# Altium PCB PCB1.PcbDoc (part 2 of 2)
Units mil, origin at the board's own origin, x right, y up, seen from the top; angles counter-clockwise.
Board outline 3870 x 3210 mil, 2 copper layers (Top Layer, Bottom Layer); 94 components, 94 nets, 473 pads, 156 vias.
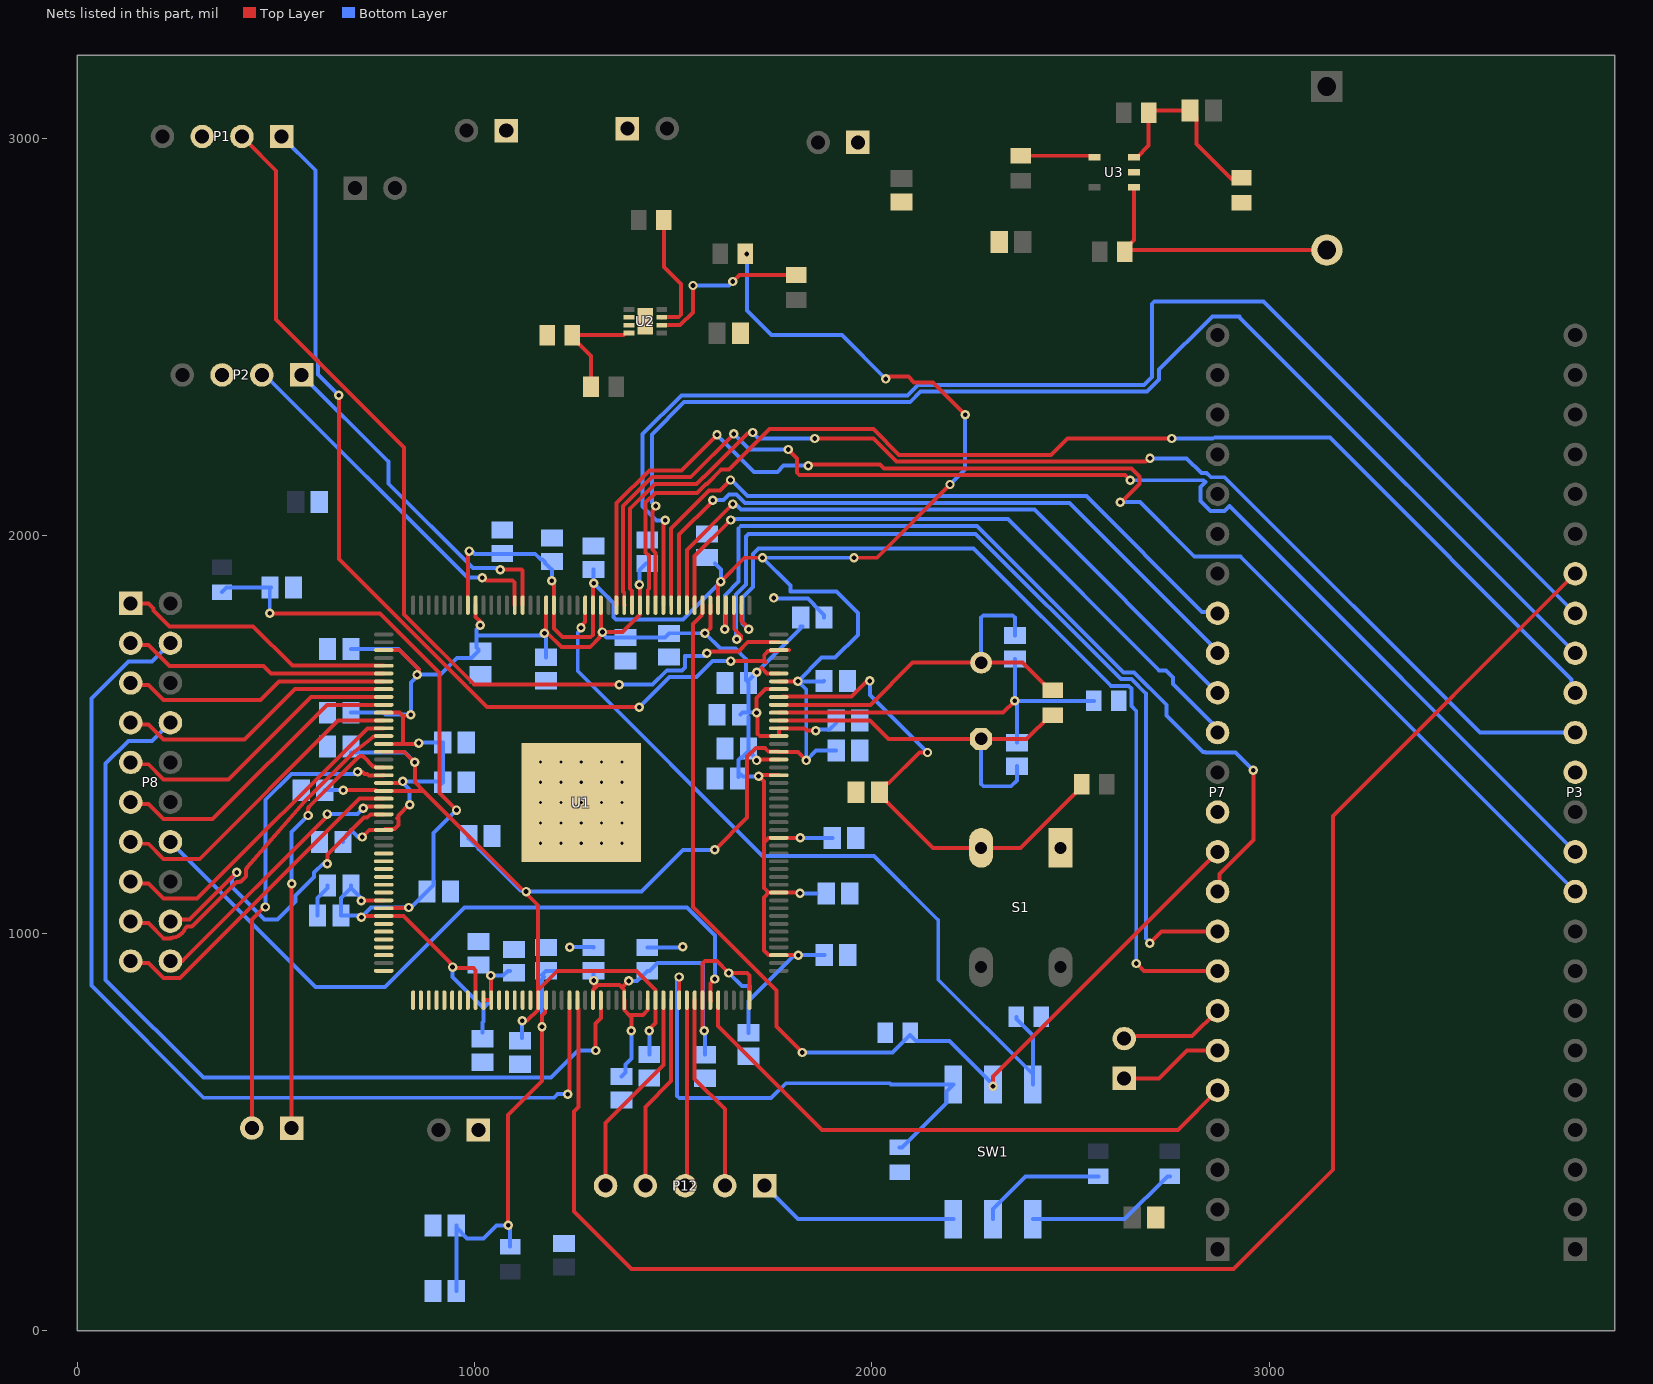
[diagram p2: the nets of this part, all layers, seen from the top]

## Via types
v1: diameter 23.62, hole 11.81, Top Layer to Bottom Layer, 156 vias

## Nets (pads, with @x,y where several pads share a name; then routed paths per layer and width w, separated by ;. In a path a pad name is that pad's centre, name@x,y a point inside that pad or via, vN(x,y) a via of type N, cw(c..) or ccw(c..) an arc to the next point about the centre after c; other vN are vias at no path point) (continued)
EM1D2: P3.10 U1.150 | length 3341
  Top Layer w10: U1.150@1357.4,1825.87 1357.4,2082.4 1440,2165 1521.32,2165 v1(1610.47,2254.15) ; v1(1840,2176.81) 1842.61,2179.42 1858.52,2179.42 1859.11,2180 2020.65,2180 2030.65,2170 2653.67,2170 2673.81,2149.86 2673.81,2130.14 2628.67,2085 v1(2625,2085)
  Bottom Layer w10: v1(1610.47,2254.15) 1703.42,2161.19 1762.06,2161.19 1777.68,2176.81 v1(1840,2176.81) ; v1(2625,2085) 2675,2085 2812.47,1947.53 2927.47,1947.53 P3.10@3770,1105
EM1D3: P3.11 U1.149 | length 3233.7
  Top Layer w10: U1.149@1377.09,1825.87 1377.01,1825.94 1377.01,1857.31 1374.4,1859.91 1374.4,2075.36 1447.04,2148 1544.33,2148 v1(1652.86,2256.53) ; v1(1789.58,2217.33) 1812.08,2194.82 1812.08,2158.86 1817.94,2153 2637,2153 v1(2650,2140)
  Bottom Layer w10: v1(1652.86,2256.53) 1692.06,2217.33 v1(1789.58,2217.33) ; v1(2650,2140) 2835,2140 2839.93,2135.07 2827.47,2122.62 2827.47,2087.38 2852.38,2062.47 2887.62,2062.47 2900.07,2074.93 P3.11@3770,1205
EM1D4: P3.14 U1.148 | length 3022
  Top Layer w10: U1.148@1396.77,1825.87 1396.69,1825.94 1396.69,1861.66 1391.4,1866.95 1391.4,2068.32 1454.08,2131 1559.24,2131 1576.05,2147.81 1577.81,2147.81 1687.39,2257.39 1697.39,2257.39 v1(1700,2260) ; v1(1856.24,2245) 2003.73,2245 2061.73,2187 2688.31,2187 2696.31,2195 v1(2700,2195)
  Bottom Layer w10: v1(1700,2260) 1715,2245 v1(1856.24,2245) ; v1(2700,2195) 2792,2195 2829,2158 2842.46,2158 2852.93,2147.53 2887.62,2147.53 3530.14,1505 P3.14@3770,1505
EM1D5: P3.15 U1.146 | length 3003.4
  Top Layer w10: U1.146@1436.14,1825.87 1436.14,1864.07 1439.02,1866.95 1439.02,1950.24 1430.58,1958.68 1430.58,2083.45 1455.18,2108.06 1560.34,2108.06 1583.1,2130.81 1584.85,2130.81 1621.04,2167 1640.67,2167 1742.48,2268.81 2003.96,2268.81 2068.77,2204 2451.12,2204 2492.12,2245 v1(2755,2245)
  Bottom Layer w10: v1(2755,2245) 2853.9,2245 ccw(c2853.9,2255) 2856.97,2245.48 cw(c2870,2205) 2870,2247.53 3152.47,2247.53 3761.01,1638.99 3761.01,1613.99 P3.15@3770,1605
EM1D6: P3.16 U1.145 | length 3233
  Top Layer w10: U1.145@1455.83,1845.47 1455.83,1859.72 1456.02,1859.91 1456.02,1957.28 1447.58,1965.73 1447.58,2063.09 1455.97,2071.49 v1(1455.97,2075.17)
  Bottom Layer w10: v1(1455.97,2075.17) 1446.9,2084.25 1446.9,2255.57 1527.78,2336.45 2096.64,2336.45 2122.99,2362.81 2691.85,2362.81 2723,2393.96 2723,2418.14 2856.86,2552 2925,2552 2925,2550 P3.16@3770,1705
EM1D7: P3.17 U1.144 | length 3386.8
  Top Layer w10: U1.144@1475.51,1825.87 1475.51,2034.54 v1(1480.23,2039.26)
  Bottom Layer w10: v1(1480.23,2039.26) 1458.21,2039.26 1423.09,2074.38 1423.09,2255.8 1520.74,2353.45 2089.59,2353.45 2115.95,2379.81 2684.81,2379.81 2705,2400 2705,2584.14 2710.86,2590 2985,2590 P3.17@3770,1805
EM1D8: P7.17 U1.143 | length 1757.3
  Top Layer w10: U1.143@1495.2,1825.87 1495.2,2018.87 1590.14,2113.81 1617.48,2113.81 v1(1644.34,2140.66)
  Bottom Layer w10: v1(1644.34,2140.66) 1647.05,2140.66 1687.72,2100 2540,2100 2831.33,1808.67 2866.33,1808.67 P7.17@2870,1805
EM1D9: P7.16 U1.142 | length 1743.2
  Top Layer w10: U1.142@1514.88,1825.87 1514.88,2003.12 1600,2088.24 v1(1600,2090)
  Bottom Layer w10: v1(1600,2090) 1626.33,2090 1640.14,2103.81 1659.86,2103.81 1680.67,2083 2497,2083 2870,1710 P7.16@2870,1705
EM1D10: P7.15 U1.141 | length 1718.7
  Top Layer w10: U1.141@1534.57,1825.87 1534.57,1964.57 v1(1650,2080)
  Bottom Layer w10: v1(1650,2080) 1656.92,2080 1670.92,2066 2409,2066 P7.15@2870,1605
EM1D11: P7.14 U1.140 | length 1715.7
  Top Layer w10: U1.140@1554.25,1825.87 1554.25,1949.25 v1(1645,2040)
  Bottom Layer w10: v1(1645,2040) 1647,2042 2343,2042 2723.18,1661.82 2739.95,1661.82 2758.05,1643.72 2758.05,1626.95 2870,1515 P7.14@2870,1505
EM1D12/GPIO72: P7.11 R12.2 SW1.2_1 U1.139 | length 2628.1
  Top Layer w10: U1.139@1573.94,1825.87 1573.86,1825.79 1573.86,1806.26 1571.17,1803.57 1571.17,1799.17 1550,1778 1550,1066.01 1760,856.01 1760,765 v1(1825,700) ; v1(2305,615) 2305,640 P7.11@2870,1205
  Bottom Layer w10: v1(1825,700) 2052.4,700 2096.5,744.09 2111.18,729.41 2195.08,729.41 SW1.2_1@2305,619.49 v1(2305,615)
EM1D13: P7.10 U1.136 | length 2291.8
  Top Layer w10: v1(1630,1765) 1630,1768.69 1632.99,1771.68 U1.136@1632.99,1825.87 ; U1.136@1633.07,1806.26 1633.07,1825.79 U1.136@1632.99,1825.87 ; P7.10@2870,1105 2874.67,1109.67 2874.67,1149.53 2960,1234.86 v1(2960,1410) ; U1.136@1632.99,1825.87 1632.99,1806.26 U1.136@1632.99,1825.87
  Bottom Layer w10: v1(1630,1765) 1630,1850 1665,1885 1665,2019.14 ; 1670.86,2025 2265.2,2025 2633.61,1656.59 2660.23,1656.59 2741.8,1575.02 2741.8,1547.59 2833.36,1456.03 2838.53,1456.03 2839.56,1455 2843.96,1455 2915,1455 v1(2960,1410)
EM1D14: P7.9 U1.135 | length 2376.9
  Top Layer w10: U1.135@1652.68,1825.87 1653.81,1824.73 1653.81,1765.19 1671.31,1747.69 1671.31,1740 1666.31,1735 1661.31,1740 v1(1660,1740) ; v1(2699.18,974.79) 2729.38,1005 P7.9@2870,1005
  Bottom Layer w10: v1@1655,1735 v1(1660,1740) 1658,1742 1658,1852.54 1683,1877.54 1683,1998 1690,2005 2261.16,2005 2626.57,1639.59 2653.19,1639.59 2690,1602.78 2690,987.46 2699.18,978.28 v1(2699.18,974.79)
EM1D15: P7.8 U1.134 | length 2289.1
  Top Layer w10: U1.134@1672.36,1825.87 1672.44,1825.79 1672.44,1785.36 1690,1767.8 v1(1690,1765) ; v1(2665.33,924.07) 2665.33,924.67 2685,905 P7.8@2870,905
  Bottom Layer w10: v1(1690,1765) 1675,1780 1675,1845.5 1701.19,1871.69 1701.19,1954.86 1715.14,1968.81 2256.19,1968.81 2602.41,1622.59 2646.15,1622.59 2653.18,1615.56 2653.18,1571.82 2665.33,1559.67 v1(2665.33,924.07)
EM1OE: P7.5 U1.84 | length 1471.6
  Top Layer w10: U1.84@1613.31,831.77 1613.31,766.69 1875,505 2770,505 P7.5@2870,605
EM1RNW: P8.14 U1.69 | length 2238.3
  Top Layer w10: v1(1305,705) 1305,773.57 1318.03,786.6 U1.69@1318.03,824.89
  Bottom Layer w10: P8.14@235,1530 189.11,1484.11 128.97,1484.11 72,1427.14 72,883 318.18,636.82 1192.53,636.82 1260.71,705 v1(1305,705)
EM1SDCKE: P8.12 U1.65 | length 2537.6
  Top Layer w10: v1(1235.16,595) 1239.29,599.13 U1.65@1239.29,831.77
  Bottom Layer w10: P8.12@235,1730 189.11,1684.11 128.97,1684.11 36,1591.14 36,868.09 317.9,586.19 1199.86,586.19 1208.67,595 v1(1235.16,595)
EM1WAIT: P8.17 U1.83 | length 1803.3
  Top Layer w10: U1.83@1595,830 1595,830.39 U1.83@1593.62,831.77 1593.7,831.85 1593.7,873.7 v1(1605,885)
  Bottom Layer w10: P8.17@235,1230 600,865 774.54,865 974.54,1065 1535,1065 1605,995 v1(1605,885)
EM1WE: P3.18 U1.66 | length 4364
  Top Layer w10: U1.66@1258.98,831.77 1259.05,831.69 1259.05,812.17 1261.66,809.56 1261.66,563.3 1250,551.63 1250,300 1395,155 2910,155 3160,405 3160,1295 P3.18@3770,1905
GND: C2.1 C3.1 C4.1 C5.1 C6.1 C7.1 C8.1 C9.1 C10.1 C11.1 C12.1 C13.1 C14.1 C15.1 C16.1 C17.1 C19.2 C20.2 C21.2 C22.2 C23.2 C24.2 C25.2 C26.2 C27.2 C28.2 C29.2 C30.2 C31.1 C32.1 C33.1 C34.1 C35.1 C36.1 C37.1 C38.1 C39.1 C40.1 C41.1 C42.1 C43.1 C45.1 C46.2 C47.1 C48.1 C49.1 C50.1 C51.1 C52.1 C53.1 C54.1 C55.2 P1.3 P2.3 P3.13 P7.12 P9.1 P10.1 P11.1 P13.1 R2.2 R4.1 R8.2 R11.1 R12.1 R13.1 S1.1 U1.29 U1.30 U1.31 U1.32 U1.33 U1.34 U1.38 U1.39 U1.40 U1.41 U1.42 U1.44 U1.45 U1.46 U1.47 U1.48 U1.49 U1.50 U1.51 U1.52 U1.56 U1.57 U1.58 U1.59 U1.60 U1.177 U1.V U2.2 U2.3 U2.9 U3.2 | length 386.4
  Bottom Layer w10: C49.1@605.47,1045 605.47,1089.09 630.47,1114.09 C53.1@630.47,1120 ; v1(1240,965) 1299.53,965 C12.1@1300,964.53 ; C17.1@1435,964.53 1522.82,964.53 v1(1524.18,965.89) ; v1(1753.33,1843.84) 1754.61,1842.56 1839.57,1842.56 1854.64,1827.49 1854.64,1826.27 1880,1800.91 C28.2@1880,1795
GPIO13: P8.1 U1.5 | length 704.4
  Top Layer w10: P8.1@135,1830 179.53,1830 192.47,1817.06 192.47,1812.38 232.33,1772.53 442.68,1772.53 541.9,1673.31 U1.5@771.77,1673.31
GPIO14: P8.2 U1.6 | length 668.4
  Top Layer w10: P8.2@135,1730 139.67,1725.33 179.53,1725.33 232.33,1672.53 469.54,1672.53 488.45,1653.62 U1.6@771.77,1653.62
GPIO15: P8.3 U1.7 | length 673.6
  Top Layer w10: P8.3@135,1630 139.67,1625.33 179.53,1625.33 217.38,1587.47 461.58,1587.47 508.05,1633.94 U1.7@771.77,1633.94
GPIO16: P8.4 U1.8 | length 706.9
  Top Layer w10: P8.4@135,1530 139.67,1525.33 179.53,1525.33 217.38,1487.47 421.42,1487.47 548.2,1614.25 U1.8@771.77,1614.25
GPIO17: P8.5 U1.9 | length 740.2
  Top Layer w10: P8.5@135,1430 139.67,1425.33 179.53,1425.33 217.38,1387.47 381.27,1387.47 588.36,1594.57 U1.9@771.77,1594.57
GPIO18: P8.6 U1.10 | length 773.4
  Top Layer w10: P8.6@135,1330 139.67,1325.33 179.53,1325.33 217.38,1287.47 341.11,1287.47 628.52,1574.88 U1.10@771.77,1574.88
GPIO19: P8.7 U1.12 | length 798.6
  Top Layer w10: P8.7@135,1230 139.67,1225.33 179.53,1225.33 217.38,1187.47 308.8,1187.47 656.84,1535.51 U1.12@771.77,1535.51
GPIO20: P8.8 U1.13 | length 831.8
  Top Layer w10: P8.8@135,1130 139.67,1125.33 179.53,1125.33 217.38,1087.47 302.47,1087.47 730.83,1515.83 U1.13@771.77,1515.83
GPIO21: P8.9 U1.14 | length 857.8
  Top Layer w10: P8.9@135,1030 139.67,1025.33 179.53,1025.33 217.38,987.47 235.16,987.47 ccw(c235.16,997.47) 237.89,987.85 241.94,989.01 cw(c244.69,979.39) 242.78,989.21 242.86,989.22 ccw(c235,1030) 272.37,1011.9 cw(c281.37,1007.54) 281.42,1017.54 286.11,1017.54 ccw(c286.11,1027.54) 293.2,1020.48 399.12,1126.41 cw(c406.21,1119.35) 406.21,1129.35 407.56,1129.35 ccw(c407.56,1139.35) 414.64,1132.3 422.7,1140.36 ccw(c415.65,1147.44) 425.65,1147.44 425.65,1158.88 cw(c435.65,1158.88) 428.1,1165.44 571.04,1329.99 cw(c591.44,1312.3) 572.36,1331.4 696.03,1455.07 cw(c715.12,1435.98) 698.49,1457.25 745.36,1493.93 cw(c751.53,1486.06) 751.53,1496.06 U1.14@752.17,1496.06
GPIO22: P8.10 U1.22 | length 841.3
  Top Layer w10: P8.10@135,930 139.67,925.33 179.53,925.33 217.38,887.47 259.22,887.47 710.41,1338.66 U1.22@771.77,1338.66
GPIO23: P8.20 U1.23 | length 700.7
  Top Layer w10: P8.20@235,930 264.85,930 630,1295.15 v1(630,1300) ; v1(720.21,1314.79) 723.9,1314.79 728.08,1318.98 U1.23@771.77,1318.98
  Bottom Layer w10: v1(630,1300) 705.42,1300 v1(720.21,1314.79)
GPIO24: P8.19 U1.24 | length 813.3
  Top Layer w10: P8.19@235,1030 239.54,1034.54 283.21,1034.54 v1(401.84,1153.16) ; v1(630,1175) 630,1198.67 722.3,1290.98 730.07,1290.98 738.31,1299.21 771.69,1299.21 U1.24@771.77,1299.29
  Bottom Layer w10: v1(401.84,1153.16) 401.84,1149.48 390,1137.64 390,1116.54 471.54,1035 505,1035 550,1080 550,1095 596.82,1141.82 596.82,1152.53 619.29,1175 v1(630,1175)
GPIO84: R13.2 SW1.1_1 U1.154 | length 2014.3
  Top Layer w10: v1(1268.04,1768.81) 1268.04,1772.5 1278.66,1783.12 U1.154@1278.66,1825.87
  Bottom Layer w10: v1(1268.04,1768.81) 1265.43,1766.2 1265.43,1762.29 1260,1756.86 1260,1660 1725,1195 2005,1195 2167.16,1032.84 2167.16,883.11 SW1.1_1@2405,645.28 ; R13.2@2363.5,790 2363.5,784.09 2405,742.6 SW1.1_1@2405,645.28 ; SW1.1_1@2405,619.49 SW1.1_1@2405,645.28
I2C_SCLA: P1.2 U1.131 | length 2445.2
  Top Layer w10: P1.2@415,2995 425,2995 501.21,2918.79 501.21,2544.81 823.26,2222.77 823.26,1801.74 999.53,1625.47 v1(1364.65,1625.47) ; v1(1585,1705) 1588.81,1708.81 1664.17,1708.81 1687.8,1732.44 1765.79,1732.44 U1.131@1765.87,1732.36
  Bottom Layer w10: v1(1364.65,1625.47) 1447.62,1625.47 1483.97,1661.82 1522.53,1661.82 1529.56,1668.85 1529.56,1697.89 1577.89,1697.89 v1(1585,1705)
I2C_SCLB: P2.2 U1.163 | length 909.4
  Top Layer w10: v1(1020,1895) 1023.69,1895 1030.43,1888.25 1095.56,1888.25 1101.42,1882.39 1101.42,1825.94 U1.163@1101.5,1825.87
  Bottom Layer w10: P2.2@465,2405 472.43,2405 982.43,1895 v1(1020,1895)
I2C_SDAA: P1.1 U1.130 | length 2490.3
  Top Layer w10: P1.1@515,3005 P1.1@518.21,3001.79 ; v1(658.68,2353.68) 658.68,1941.32 1031.14,1568.86 v1(1415.05,1568.86) ; v1(1645,1685) 1645.16,1685.16 1728.85,1685.16 1731.47,1682.53 1732.09,1683.15 1729.26,1685.98 1729.26,1700 1739.17,1709.91 1763.1,1709.91 U1.130@1765.87,1712.68 1765.94,1712.76 1791.29,1712.76
  Bottom Layer w10: P1.1@515,3005 600,2920 600,2446.03 606.53,2439.5 606.53,2405.82 v1(658.68,2353.68) ; v1(1415.05,1568.86) 1491.01,1644.82 1558.49,1644.82 1598.67,1685 v1(1645,1685)
I2C_SDAB: P2.1 U1.162 | length 879.2
  Top Layer w10: v1(1065,1915) 1118.61,1915 1121.18,1912.43 U1.162@1121.18,1825.87 U1.162@1121.1,1825.94
  Bottom Layer w10: P2.1@565,2405 783.2,2186.8 783.2,2131.59 995.98,1918.81 1061.19,1918.81 v1(1065,1915)
JTAG_TRST: P12.1 SW1.3 | length 510
  Bottom Layer w10: P12.1@1730,365 1814.49,280.51 SW1.3@2205,280.51
NetC44_1: C44.1 R7.2 R8.1 U3.3 | length 453.1
  Top Layer w10: U3.3@2659.75,2952.4 2667,2952.4 2696.5,2981.9 R7.2@2696.5,3065 2701.5,3070 C44.1@2800.47,3070 2817.13,3053.35 2817.13,2985.75 R8.1@2904.66,2898.21
NetD1_1: D1.1 L4.2 U3.1 | length 682.4
  Top Layer w10: U3.1@2659.75,2877.6 2659.75,2744.16 2636.5,2720.91 L4.2@2636.5,2715 2640.59,2719.09 D1.1@3145,2719.09
NetL2_1: L2.1 U2.7 | length 308
  Top Layer w10: U2.7@1471.34,2549.84 1472.12,2550.62 1514.14,2550.62 1520,2556.48 1520,2633.63 1476.5,2677.13 L2.1@1476.5,2795
NetR3_1: R3.1 U2.6 | length 430.6
  Top Layer w10: U2.6@1471.34,2530.16 1517.72,2530.16 1550,2562.44 v1(1550,2630) ; v1(1650,2640) 1666.5,2656.5 R3.1@1810,2656.5
  Bottom Layer w10: v1(1550,2630) 1640,2630 v1(1650,2640)
NetR4_2: R4.2 R5.1 U2.4 | length 293.9
  Top Layer w10: R5.1@1293.5,2375 1293.5,2452.09 1246.5,2499.09 R4.2@1246.5,2505 1375.32,2505 1380.79,2510.47 U2.4@1388.66,2510.47
NetR6_2: R6.2 U3.4 | length 186.9
  Top Layer w10: R6.2@2375,2956.5 2548.91,2956.5 2553,2952.4 U3.4@2560.25,2952.4
NetR9_1: R9.1 SW1.2 | length 324.8
  Bottom Layer w10: SW1.2@2305,280.51 2305,306.3 2387.2,388.5 R9.1@2570,388.5
NetR10_1: R10.1 SW1.1 | length 389.7
  Bottom Layer w10: SW1.1@2405,280.51 2636.1,280.51 2744.09,388.5 R10.1@2750,388.5
RESET#: C55.1 R14.1 S1.2 U1.124 | length 1281.6
  Top Layer w10: U1.124@1775,1596.33 1948.95,1596.33 1987.62,1635 v1(1995,1635) ; v1(2140,1455) 2119.53,1455 2042.09,1377.56 2036.18,1377.56 2019.53,1360.91 C55.1@2019.53,1355 2019.53,1349.09 2153.62,1215 S1.2@2275,1215 2374.41,1215 2528.5,1369.09 R14.1@2528.5,1375
  Bottom Layer w10: v1(1995,1635) 1995,1600 v1(2140,1455)
SCIRXDA: P4.2 U1.19 | length 1172.6
  Top Layer w10: P4.2@440,510 440,1035 471.11,1066.11 v1(474.11,1066.11) ; v1(705.98,1406.37) 717.95,1406.37 722.94,1401.38 730.19,1401.38 734.29,1397.28 771.33,1397.28 U1.19@771.77,1397.72
  Bottom Layer w10: v1(474.11,1066.11) 474.11,1336 539.3,1401.19 700.8,1401.19 v1(705.98,1406.37)
SCITXDA: P4.1 U1.18 | length 1078.1
  Top Layer w10: P4.1@540,510 v1(540,1125) ; v1(581.44,1296.44) 581.44,1312.3 cw(c591.44,1312.3) 584.37,1319.37 708.05,1443.05 cw(c715.12,1435.98) 722.17,1443.07 ; 722.19,1443.05 745.08,1420.16 U1.18@749.44,1420.16 ; U1.18@749.48,1420.16 752.17,1417.48 771.69,1417.48 U1.18@771.77,1417.4
  Bottom Layer w10: v1(540,1125) 540,1255 v1(581.44,1296.44)
SRAM_LB: P5.2 P7.7 | length 264
  Top Layer w10: P5.2@2635,735 2641,741 2806,741 P7.7@2870,805
SRAM_UB: P5.1 P7.6 | length 264
  Top Layer w10: P5.1@2635,635 2723.13,635 2793.13,705 P7.6@2870,705
TCK: P12.2 U1.81 | length 498.1
  Top Layer w10: U1.81@1554.25,831.77 1554.25,633.13 1630,557.39 P12.2@1630,365
TDI: P12.5 U1.77 | length 527
  Top Layer w10: P12.5@1330,365 1330,522.5 1475.51,668.02 U1.77@1475.51,831.77
TDO: P12.4 U1.78 | length 493.8
  Top Layer w10: P12.4@1430,365 1430,562.66 1495.2,627.86 U1.78@1495.2,831.77
TMS: P12.3 U1.80 | length 468.7
  Top Layer w10: P12.3@1530,365 1534.49,369.49 1534.49,831.69 U1.80@1534.57,831.77
TRST: R11.2 SW1.3_1 U1.79 | length 1291.2
  Top Layer w10: U1.79@1514.88,831.77 U1.79@1514.88,831.77 1514.94,889.94 v1(1515,890)
  Bottom Layer w10: v1(1515,890) 1510,885 1510,590.86 1515.86,585 1746.24,585 1783.86,622.62 2045.6,622.62 2048.73,619.49 SW1.3_1@2205,619.49 2187.76,602.24 2187.76,573.35 2075.91,461.5 R11.2@2070,461.5
VDD: C32.2 C33.2 C34.2 C35.2 C36.2 C37.2 C38.2 C39.2 C40.2 C41.2 C42.2 L3.2 U1.16 U1.21 U1.61 U1.76 U1.117 U1.126 U1.137 U1.153 U1.158 U1.169 | length 6957.3
  Top Layer w10: v1(670,1360) 750.51,1360 U1.21@752.17,1358.35 ; U1.21@771.77,1358.35 871.94,1358.35 ; U1.16@771.77,1456.77 823.23,1456.77 v1(850,1430) 850,1380.28 871.94,1358.35 ; U1.169@983.39,1825.87 983.46,1825.94 983.46,1958.46 v1(986.73,1961.73) ; v1(1120,780) 1132.71,780 1160.05,807.34 U1.61@1160.05,831.27 ; U1.61@1160.55,831.77 1160.55,1069.73 871.94,1358.35 ; 1160.63,857.2 1208.43,905 1407.94,905 1455.75,857.2 1455.75,831.85 U1.76@1455.83,831.77 1455.83,774.51 1440,758.69 v1(1440,755) ; v1(1194.96,1887.27) 1194.96,1883.59 1199.92,1878.62 U1.158@1199.92,1825.87 1199.92,1767.14 1222.06,1745 1292.41,1745 1298.27,1750.86 1298.27,1825.79 U1.153@1298.35,1825.87 1298.42,1825.94 1298.42,1878.5 v1(1300.49,1880.56) ; v1(1605,1210) 1686.19,1291.19 1686.19,1444.86 1708.02,1466.69 1730.6,1466.69 1740.44,1456.85 1765.79,1456.85 U1.117@1765.87,1456.77 1766.45,1456.19 1813.81,1456.19 v1(1835,1435) ; U1.137@1613.31,1825.87 1613.31,1874.62 ; v1(1620,1885) 1680,1945 v1(1725,1945) ; U1.126@1765.79,1633.86 U1.126@1765.87,1633.94 1765.93,1634 v1(1814,1634) ; v1(1955,1945) 2012.63,1945 v1(2196.82,2129.19) ; v1(2035,2395) 2041.07,2401.07 2091.79,2401.07 2106.68,2386.19 2153.81,2386.19 v1(2235,2305)
  Bottom Layer w10: C33.2@623.35,1360 v1(670,1360) ; C42.2@689.53,1455 825,1455 v1(850,1430) ; C32.2@985.47,1245 985.47,1239.09 1010.83,1213.73 1010.83,1212.51 1115.74,1107.61 1127.39,1107.61 v1(1130,1105) 1420,1105 1525,1210 v1(1605,1210) ; v1(986.73,1961.73) 989.34,1959.13 995.87,1959.13 1000,1955 1152.87,1955 1167.47,1940.4 1171.58,1940.4 1177.44,1934.54 1177.44,1931.65 1194.09,1915 1195,1915 v1(1194.96,1887.27) v1(1194.96,1887.27) ; C34.2@1120,736.57 v1(1120,780) ; C39.2@1300,1915.47 1300,1881.05 v1(1300.49,1880.56) 1350,1831.05 1350,1795.86 1355.86,1790 1525,1790 v1(1620,1885) 1620,1915.47 C38.2@1605,1930.47 ; C35.2@1440,695 v1(1440,755) ; v1(1685.49,2709.11) 1685.49,2566.84 1747.33,2505 1925,2505 v1(2035,2395) ; C37.2@1880,1635 1879,1634 v1(1814,1634) ; C36.2@1910.47,1460 1860,1460 v1(1835,1435) 1835,1613 v1(1814,1634) ; v1(1955,1945) v1(1725,1945) 1795,1875 1795,1859.56 1911.15,1859.56 1965,1805.71 1965,1750.86 1907.87,1693.73 1873.73,1693.73 v1(1814,1634) ; v1(2196.82,2129.19) 2235,2167.37 v1(2235,2305)
VDDA: C48.2 C49.2 C50.2 C51.2 C52.2 C53.2 C54.2 L5.2 U1.35 U1.36 U1.37 U1.53 U1.54 U1.55 | length 2603
  Top Layer w10: v1(485,1805) 762.44,1805 912.54,1654.9 912.54,1352.46 v1(955,1310) ; v1(715,1081.81) 716.02,1082.83 771.69,1082.83 U1.35@771.77,1082.76 ; v1(715.62,1040.62) 719.31,1040.62 722.07,1043.39 U1.37@771.77,1043.39 821.61,1043.39 938.54,926.46 938.54,925.14 945,918.69 v1(945,915) 947.61,912.39 997.29,912.39 1003.15,906.54 1003.15,831.85 U1.53@1003.07,831.77 ; U1.36@791.38,1063.15 832.94,1063.15 v1(834.79,1065) ; U1.54@1022.76,831.77 U1.55@1042.44,831.77 1042.36,892.64 v1(1041.18,893.82)
  Bottom Layer w10: L5.2@365,1858.5 376.5,1870 C48.2@485.47,1870 488.12,1870 485,1866.88 v1(485,1805) ; C53.2@689.53,1120 C53.2@689.53,1114.09 ; v1(715,1081.81) 715,1088.62 C53.2@689.53,1114.09 ; v1(945,915) 945,889.84 1022.5,812.34 1022.5,811.83 ; v1(955,1310) 897.13,1252.13 897.13,1121.65 C52.2@880.47,1105 840.47,1065 v1(834.79,1065) 740,1065 v1(715.62,1040.62) 711.24,1045 C49.2@664.53,1045 664.53,1089.09 C53.2@689.53,1114.09 ; C50.2@1020,750 1020,775 1022.5,777.5 1022.5,811.83 ; C51.2@1090,905.47 1084.09,905.47 1072.44,893.82 v1(1041.18,893.82) 1041.18,830.51 1022.5,811.83
VDDIO: C3.2 C4.2 C5.2 C6.2 C7.2 C8.2 C9.2 C10.2 C11.2 C12.2 C13.2 C14.2 C15.2 C16.2 C17.2 C19.1 C20.1 C21.1 C22.1 C23.1 C24.1 C25.1 C26.1 C27.1 C28.1 C29.1 C30.1 L1.2 U1.3 U1.11 U1.15 U1.20 U1.26 U1.62 U1.68 U1.72 U1.75 U1.82 U1.88 U1.91 U1.99 U1.106 U1.114 U1.116 U1.119 U1.120 U1.125 U1.127 U1.138 U1.147 U1.152 U1.159 U1.168 | length 7948.4
  Top Layer w10: v1(717.66,1242.28) 735.34,1259.96 771.73,1259.96 U1.26@771.77,1259.92 774.53,1262.68 798.47,1262.68 808.38,1272.6 808.38,1286.61 805.54,1289.45 808.38,1292.28 808.38,1296.53 835.37,1323.52 v1(836.9,1323.52) ; U1.15@771.77,1476.46 771.85,1476.53 814.99,1476.53 ; U1.11@771.77,1555.2 811.16,1555.2 818.96,1547.39 820,1547.39 ; U1.3@771.77,1712.68 771.85,1712.6 811,1712.6 860.16,1663.44 ; U1.20@791.38,1378.03 812.19,1378.03 816.31,1382.16 v1(820,1382.16) ; v1(840,1550) 837.39,1547.39 820,1547.39 ; v1(860.23,1478.63) 858.13,1476.53 814.99,1476.53 ; U1.168@1003.07,1825.87 1003.15,1825.79 1003.15,1795.91 1015,1784.06 v1(1015,1775) ; v1(1085,265) 1085,543.2 1170,628.2 v1(1170,765) 1170,793.25 1177.47,800.72 1177.47,809.48 1180.16,812.17 1180.16,831.69 U1.62@1180.24,831.77 ; U1.159@1180.31,1806.26 1180.31,1762.7 1184.33,1758.69 1184.33,1755 1219.33,1720 1291.45,1720 1315.27,1743.82 1315.27,1747.43 ; U1.68@1298.35,831.77 1298.42,831.85 1298.42,857.19 1304.52,863.29 ; v1(1300,881.19) 1302.61,878.58 1302.61,865.2 1304.52,863.29 ; U1.152@1317.95,1825.79 v1@1317.95,1760.86 ; v1@1320.07,1759.94 1319.15,1760.86 v1@1317.95,1760.86 ; v1(1388.28,880.12) 1387.75,880.12 1370.92,863.29 ; v1(1395,755) 1395,788.51 1389.35,794.17 ; v1(1415.21,1876.82) 1416.38,1875.65 1416.38,1825.94 U1.147@1416.46,1825.87 1416.38,1825.79 1416.38,1801.86 1372.45,1757.93 v1(1322.08,1757.93) 1320.88,1757.93 v1@1317.95,1760.86 ; U1.75@1436.14,831.77 1436.06,831.69 1436.06,806.35 1423.88,794.17 1389.35,794.17 ; v1@1573.94,762.81 U1.82@1573.94,831.77 1574.02,831.85 1574.02,924.14 1579.87,930 1610,930 v1(1640,900) 1686.11,900 1691.97,894.14 1691.97,831.85 U1.88@1692.05,831.77 ; v1(1580,1755) 1593.62,1768.62 U1.138@1593.62,1825.87 ; v1(1710,1435) 1717.91,1435 1720,1437.09 U1.116@1765.87,1437.09 ; v1(1710.72,1657.08) 1721.8,1668.16 1736.26,1653.7 1765.79,1653.7 U1.127@1765.87,1653.62 ; U1.91@1765.87,944.96 1765.79,945.04 1740.44,945.04 1728.26,957.22 1728.26,1090.18 1740.44,1102.36 ; U1.114@1765.87,1397.72 1721.4,1397.72 1718.69,1395 v1(1715,1395) 1728.26,1381.74 1728.26,1227.98 ; U1.125@1765.87,1614.25 1765.79,1614.33 1732.23,1614.33 1710,1592.1 v1(1710,1555) 1712.61,1552.39 1712.61,1502 1718.46,1496.14 U1.119@1765.87,1496.14 U1.120@1765.87,1515.83 1830.49,1515.83 1836.31,1510 v1(1858.81,1510) ; U1.91@1765.87,944.96 v1(1815,945) ; v1(1819.38,1100.62) 1817.64,1102.36 1740.44,1102.36 ; v1(1819.84,1240.16) U1.106@1765.87,1240.24 U1.106@1765.87,1240.24 1765.79,1240.16 1740.44,1240.16 1728.26,1227.98 ; 814.99,1476.53 820,1481.54 820,1547.39 ; 1304.52,863.29 1310.61,869.38 1364.83,869.38 1370.92,863.29 ; 1370.92,863.29 1377.01,857.2 1377.01,831.85 U1.72@1377.09,831.77 1377.16,831.69 1377.16,806.35 1389.35,794.17 ; 1728.26,1227.98 1728.26,1114.54 1740.44,1102.36
  Bottom Layer w10: C9.2@669.53,1230 669.53,1235.91 689.53,1255.91 689.53,1260 707.25,1242.28 v1(717.66,1242.28) ; C6.2@689.53,1555 771.58,1555 776.58,1550 v1(840,1550) 840,1631.31 858.27,1649.58 v1@858.27,1650.66 ; C5.2@689.53,1715 808.6,1715 860.16,1663.44 858.27,1661.55 v1@858.27,1650.66 ; v1(836.9,1323.52) 836.9,1361.57 820,1378.47 v1(820,1382.16) 908.32,1382.16 C8.2@915.47,1375 ; v1(860.23,1478.63) 861.6,1480 C7.2@920.47,1480 C8.2@920.47,1380 ; C3.2@954.53,100 C4.2@954.53,259.09 ; C4.2@954.53,265 C4.2@954.53,259.09 ; v1(1015,1775) 1005,1765 1005,1749.06 ; L1.2@1090,211.5 1090,256.31 1085,261.31 v1(1085,265) 1055.63,265 1023.07,232.44 981.18,232.44 C4.2@954.53,259.09 ; v1(1170,765) 1170,885.47 1175,890.47 1170,895.47 C10.2@1180,905.47 C12.2@1300,905.47 v1(1300,881.19) ; v1(1176.11,1755) 1176.11,1749.53 1005.47,1749.53 1005,1749.06 ; C29.1@1180,1694.53 v1@1180,1746.98 ; v1(1322.08,1757.93) 1322.08,1754.56 1332.11,1744.53 C30.1@1380,1744.53 1480,1744.53 C14.2@1490,1754.53 1490.47,1755 v1(1580,1755) 1618.81,1716.19 1657.34,1716.19 1682.77,1690.75 1682.77,1636.76 C26.1@1689.53,1630 C25.1@1689.53,1555 ; C11.2@1370,639.53 1380.32,649.85 1380.32,670.32 1395,685 v1(1395,755) ; v1(1388.28,880.12) 1409.65,880.12 C17.2@1435,905.47 1440.91,905.47 1460.43,925 1569.14,925 1575,919.14 1575,761.75 1576.77,759.98 v1@1576.77,751.94 ; v1(1415.21,1876.82) 1415,1877.03 1415,1913.82 1431.65,1930.47 C15.2@1435,1930.47 ; C13.2@1580,694.53 v1@1580,748.71 ; v1(1640,900) 1672.95,867.05 1692.05,867.05 1692.05,832.05 ; C25.1@1669.53,1550 1674.53,1555 C25.1@1689.53,1555 ; C25.1@1689.53,1544.09 C24.1@1689.53,1465 C24.1@1689.53,1459.09 ; C26.1@1689.53,1635.91 1820.95,1767.32 1820.95,1772.44 C28.1@1826.06,1772.44 ; C19.1@1690,749.53 1690,829.72 1692.05,831.77 1692.05,832.05 ; v1(1710,1435) 1713.62,1435 C24.1@1689.53,1459.09 ; v1(1710,1555) C25.1@1689.53,1555 ; v1(1715,1395) 1676.18,1395 1671.18,1400 1665,1393.82 1665,1436.58 1670.86,1442.44 1672.87,1442.44 C24.1@1689.53,1459.09 ; v1(1819.38,1100.62) 1820,1100 1860.47,1100 ; v1(1819.84,1240.16) 1900.31,1240.16 C22.1@1900.47,1240 ; v1(1858.81,1510) 1861.25,1512.44 1893.82,1512.44 1910.47,1529.09 C27.1@1910.47,1535 ; C20.1@1880.47,945 v1(1815,945) 1812.39,942.39 1802.39,942.39 1692.05,832.05 ; v1@858.27,1650.66 914.34,1650.66 956.55,1692.87 992.44,1692.87 1010,1710.43 1010,1714.53 1005,1719.53 1005,1749.06
  other v1: 1578.06,755 855.66,1650.66
VSSOSC: C1.2 C18.2 R2.1 U1.122 | length 1018
  Top Layer w10: U1.122@1765.87,1555.2 2330.2,1555.2 v1(2360,1585)
  Bottom Layer w10: C1.2@2360,1690.47 v1(2360,1585) ; C18.2@2365,1479.53 2365,1580 v1(2360,1585) ; R2.1@2558.5,1585 v1(2360,1585)
X1: C1.1 Q1.2 R1.2 U1.123 | length 1009.5
  Top Layer w10: U1.123@1765.87,1574.88 1996.46,1574.88 2102.64,1681.06 Q1.2@2275,1681.06 2379.53,1681.06 2449.09,1611.5 R1.2@2455,1611.5
  Bottom Layer w10: Q1.2@2275,1681.06 2275,1794.14 2280.86,1800 2354.14,1800 2360,1794.14 C1.1@2360,1749.53
X2: C18.1 Q1.1 R1.1 U1.121 | length 980.3
  Top Layer w10: U1.121@1765.87,1535.51 1995.63,1535.51 2042.2,1488.94 Q1.1@2275,1488.94 2389.53,1488.94 2449.09,1548.5 R1.1@2455,1548.5
  Bottom Layer w10: Q1.1@2275,1488.94 2275,1375.86 2280.86,1370 2350,1370 2365,1385 C18.1@2365,1420.47
pads on no net: P3.6 P3.19 P7.18 S1.3 S1.4 U1.1 U1.2 U1.4 U1.17 U1.25 U1.27 U1.28 U1.73 U1.74 U1.92 U1.97 U1.98 U1.100 U1.101 U1.102 U1.103 U1.104 U1.105 U1.107 U1.108 U1.109 U1.110 U1.111 U1.112 U1.118 U1.132 U1.133 U1.160 U1.161 U1.164 U1.165 U1.166 U1.167 U1.176

## Polygon pours and split planes (outlines as drawn)
GND on Bottom Layer "GND_L02_P000" (solid, pour order 0): 3870,0 0,0 0,3210 3870,3210
GND on Top Layer "GND_L01_P001" (solid, pour order 1): 0,0 3870,0 3870,3210 0,3210

## Keep-outs
Keep-Out Layer:
  the board outline again, w10

## Silkscreen, mask and mechanical layers (free items; w line width, h text height)
Top Overlay:
  text "Nunchuck A" at 110,3130 h60
  text "+3.3" at 955,2945 h60 r270
  text "GND" at 1055,2945 h60 r270
  text "+3.3V" at 185,2935 h60 r270
  text "GND" at 290,2935 h60 r270
  text "SDA" at 485,2935 h60 r270
  text "SCL" at 380,2930 h60 r270
  text "+5V" at 1840,2920 h60 r270
  text "GND" at 1940,2915 h60 r270
  text "Nunchuck B" at 105,2535 h60
  text "GND" at 320,2320 h60 r270
  text "SCL" at 420,2320 h60 r270
  text "SDA" at 525,2320 h60 r270
  text "+3.3V" at 220,2315 h60 r270
  text "LB" at 2435,715 h60
  text "XBEE" at 375,635 h60
  text "UB" at 2435,610 h60
  text "GND" at 980,440 h60 r270
  text "RX" at 390,430 h60 r270
  text "DAC" at 870,430 h60 r270
  text "TX" at 500,425 h60 r270
  text "TCK" at 1310,280 h60 r270
  text "TDI" at 1405,275 h60 r270
  text "TDO" at 1510,275 h60 r270
  text "TMS" at 1610,275 h60 r270
  text "TRST" at 1705,275 h60 r270

## Text inside footprints (layer, text, board x,y; h text height)
P8: Top Overlay "20" at 215,845 h50 r270; Top Overlay "10" at 115,845 h50 r270; Top Overlay "1" at 215,1925 h50 r270; Top Overlay "1" at 215,1965 h50 r270; Top Overlay "1" at 105,1925 h50 r270
U1: Top Overlay "Designator12" at 1124.47,1909.14 h50; Top Overlay "TOL" at 1268.82,1328.82 h50; Top Overlay "VAL" at 1268.82,1328.82 h50; Top Overlay "PN" at 1268.82,1328.82 h50; Top Overlay "DEV" at 1268.82,1328.82 h50
U3: Mechanical 13 "*" at 2647,2904.6 h50 r180